# EAGLE board mainboard.job (EAGLE 6.5.0)
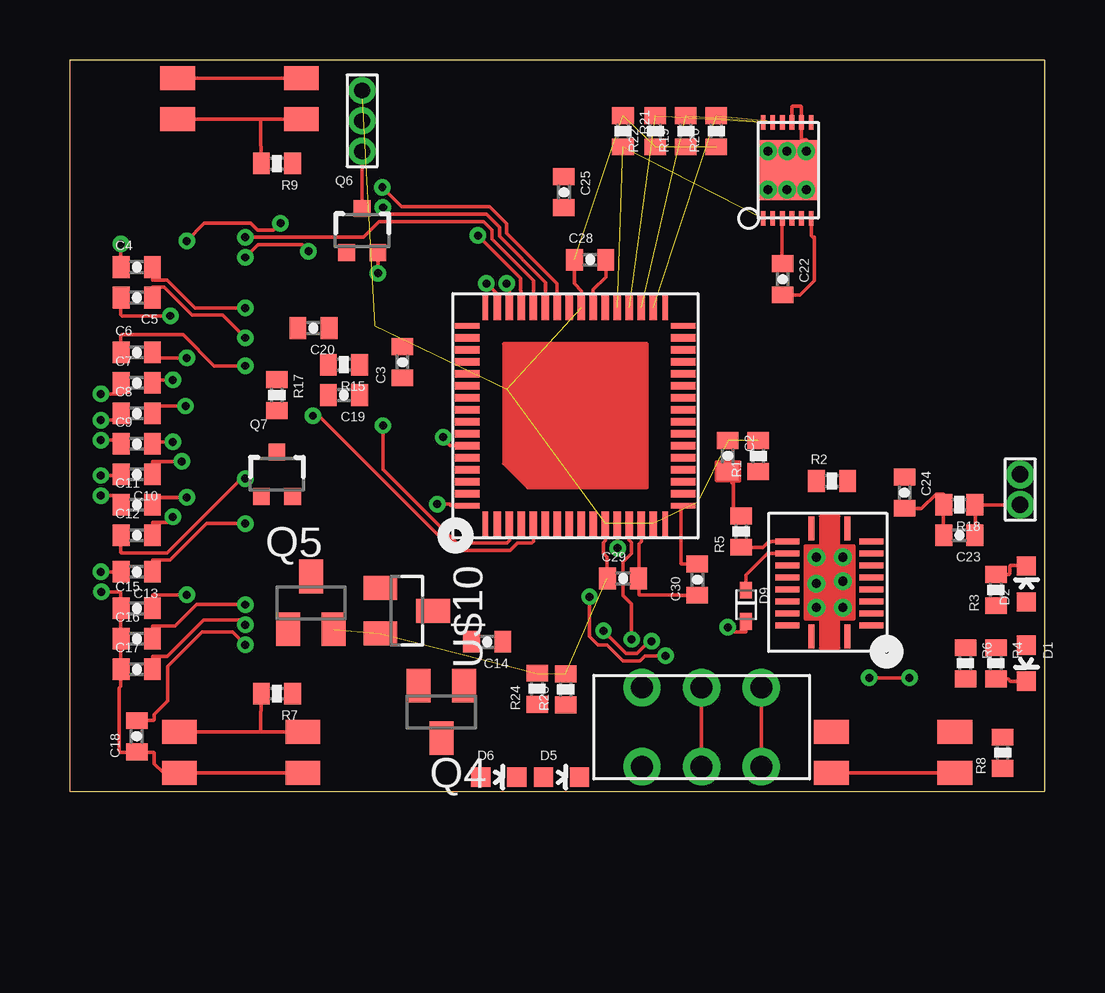
[diagram p0: board, top side]
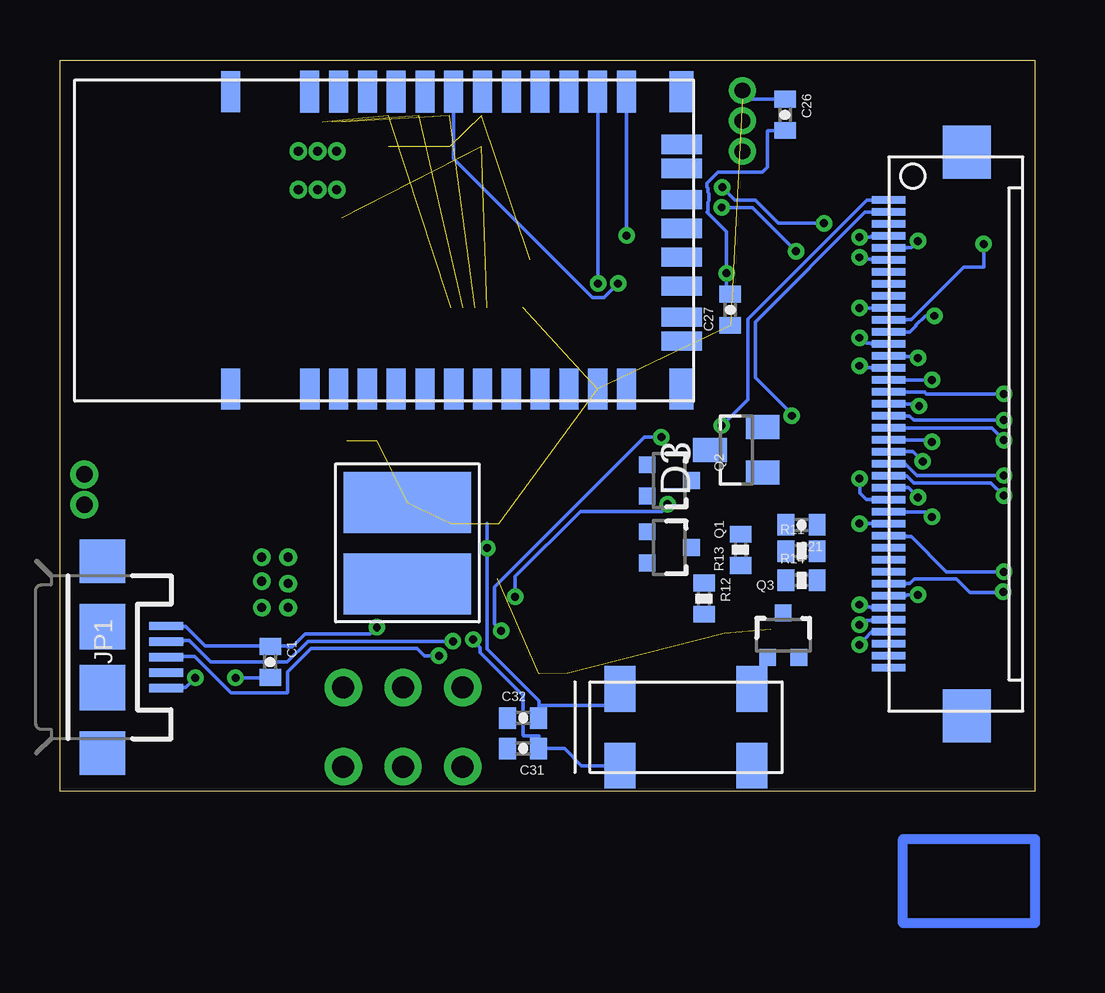
[diagram p1: board, bottom side, seen from below]

Size 40.64 x 30.48 mm. Coordinates in mm from the lower left corner, seen from the top.
Outline: 0,0 40.64,0 40.64,30.48 0,30.48 0,0
Copper layers (1*16): Top 0.035mm / dielectric 1.5mm / Bottom 0.035mm
Design rules "default *": minimum track width 6mil, minimum drill 13mil, track to track 6mil, track to pad 6mil, pad to pad 6mil, via to via 6mil, smd to smd 6mil, copper to edge 7mil, drill to drill 8mil, minimum pad ring 7mil, minimum via ring 7mil, stop-mask expansion 4mil, vias tented up to drill 0mil, thermal gap 10mil

## Footprints (pad centres in the part's own frame; a part is rotated, then mirrored left to right if it is on the bottom)
0402-CAP = smd 0.7 x 0.9: 1 -0.65,0; 2 0.65,0
LED-0603 = smd 0.8 x 0.8: A 0,-0.75; C 0,0.75
SOT23 = smd 1 x 1.4: 1 -0.95,-1.1; 2 0.95,-1.1; 3 0,1.1
SOD523 = smd 0.7 x 0.5: A 0.7,0; C -0.6,0
USB-MICROB = smd 0.35 x 1.4: D+ 0,2.65; D- -0.65,2.65; GND 1.3,2.65; ID 0.65,2.65; VBUS -1.3,2.65 | smd 1.8 x 1.9: MT1 -4,0; MT2 4,0 | smd 1.9 x 1.9: P$1 -1.27,0; P$2 1.27,0
ASPI_0428S-100M-T = smd 5.309 x 2.54: 1 0,0; 2 0,3.404
SOT323 = smd 0.7 x 0.7: 1 -0.65,-0.925; 2 0.65,-0.925; 3 0,0.925
0402-RES = smd 0.7 x 0.9: 1 -0.65,0; 2 0.65,0
VQFN_RGC_64PIN = smd 1.016 x 0.229: 1 0,8.25; 16 0,0.75; 33 9,0.75; 48 9,8.25 | smd 1.016 x 0.305: 2 0,7.75; 3 0,7.25; 4 0,6.75; 5 0,6.25; 6 0,5.75; 7 0,5.25; 8 0,4.75; 9 0,4.25; 10 0,3.75; 11 0,3.25; 12 0,2.75; 13 0,2.25; 14 0,1.75; 15 0,1.25; 34 9,1.25; 35 9,1.75; 36 9,2.25; 37 9,2.75; 38 9,3.25; 39 9,3.75; 40 9,4.25; 41 9,4.75; 42 9,5.25; 43 9,5.75; 44 9,6.25; 45 9,6.75; 46 9,7.25; 47 9,7.75 | smd 0.229 x 1.016: 17 0.75,0; 32 8.25,0; 49 8.25,9; 64 0.75,9 | smd 0.305 x 1.016: 18 1.25,0; 19 1.75,0; 20 2.25,0; 21 2.75,0; 22 3.25,0; 23 3.75,0; 24 4.25,0; 25 4.75,0; 26 5.25,0; 27 5.75,0; 28 6.25,0; 29 6.75,0; 30 7.25,0; 31 7.75,0; 50 7.75,9; 51 7.25,9; 52 6.75,9; 53 6.25,9; 54 5.75,9; 55 5.25,9; 56 4.75,9; 57 4.25,9; 58 3.75,9; 59 3.25,9; 60 2.75,9; 61 2.25,9; 62 1.75,9; 63 1.25,9
RN-42 = smd 1.7 x 0.8: 1 0.5,16; 2 0.5,14.8; 3 0.5,13.6; 4 0.5,12.4; 5 0.5,11.2; 6 0.5,10; 7 0.5,8.8; 8 0.5,7.6; 9 0.5,6.4; 10 0.5,5.2; 11 0.5,4; 12 0.5,2.8; 13 12.9,2.8; 14 12.9,4; 15 12.9,5.2; 16 12.9,6.4; 17 12.9,7.6; 18 12.9,8.8; 19 12.9,10; 20 12.9,11.2; 21 12.9,12.4; 22 12.9,13.6; 23 12.9,14.8; 24 12.9,16; P$35 0.5,19.3; P$36 12.9,19.3 | smd 0.8 x 1.7: 28 9.7,0.5; 29 3.5,0.5; 30 10.7,0.5; 31 8.4,0.5; 32 7.2,0.5; 33 6,0.5; 34 4.8,0.5; 35 2.5,0.5 | smd 1.7 x 1: P$33 0.5,0.5; P$34 12.9,0.5
VQFN_RHL_20PIN = smd 1 x 0.25: 1 0,1; 10 4.5,1; 11 4.5,2.5; 20 0,2.5 | smd 0.25 x 1: 2 0.45,0; 3 0.95,0; 4 1.45,0; 5 1.95,0; 6 2.45,0; 7 2.95,0; 8 3.45,0; 9 3.95,0; 12 3.95,3.5; 13 3.45,3.5; 14 2.95,3.5; 15 2.45,3.5; 16 1.95,3.5; 17 1.45,3.5; 18 0.95,3.5; 19 0.45,3.5 | drill 0.381: P$21 1.2,2.3; P$22 1.2,1.2; P$23 2.3,1.2; P$24 2.2,2.3; P$25 3.3,2.3; P$26 3.3,1.2
EVQ-PUK02K = smd 1.45 x 1: 1 5.15,1.7; 2 5.15,0; 3 0,1.7; 4 0,0
FH12-40S-0.5SH = smd 0.31 x 1.4: 1 0,0; 2 0.5,0; 3 1,0; 4 1.5,0; 5 2,0; 6 2.5,0; 7 3,0; 8 3.5,0; 9 4,0; 10 4.5,0; 11 5,0; 12 5.5,0; 13 6,0; 14 6.5,0; 15 7,0; 16 7.5,0; 17 8,0; 18 8.5,0; 19 9,0; 20 9.5,0; 21 10,0; 22 10.5,0; 23 11,0; 24 11.5,0; 25 12,0; 26 12.5,0; 27 13,0; 28 13.5,0; 29 14,0; 30 14.5,0; 31 15,0; 32 15.5,0; 33 16,0; 34 16.5,0; 35 17,0; 36 17.5,0; 37 18,0; 38 18.5,0; 39 19,0; 40 19.5,0 | smd 2.2 x 2: G@0 -2,3.25; G@1 21.5,3.25
SON_DRZ_12PIN = smd 0.2 x 0.6: 1 0.2,0; 2 0.6,0; 3 1,0; 4 1.4,0; 5 1.8,0; 6 2.2,0; 7 2.2,4; 8 1.8,4; 9 1.4,4; 10 1,4; 11 0.6,4; 12 0.2,4 | smd 2.5 x 2.5: 13 1.25,2 | drill 0.381: P$15 0.4,2.8; P$16 1.2,2.8; P$17 2,2.8; P$18 2,1.2; P$19 1.2,1.2; P$20 0.4,1.2
HEADER_2PIN_50MIL = drill 0.686 pad 1.016: 1 1.27,1.27; 2 1.27,2.54
HEADER_3PIN_50MIL = drill 0.66 pad 1.016: 1 1.27,1.27; 2 1.27,2.54; 3 1.27,3.81
JS2202011AQN = drill 0.914: 1 2.007,0; 2 4.496,0; 3 6.985,0; 4 2.007,3.302; 5 4.496,3.302; 6 6.985,3.302
ECS-327-12.5-17X-C-TR = smd 1.3 x 1.9: 1 1.25,0.3; 2 6.75,0.3; 3 6.75,3.5; 4 1.25,3.5

## Placement (x,y rotation side)
C1  0.1uF  [0402-CAP]  31.88,5.38 270 bottom
C2  10uF  [0402-CAP]  27.43,13.97 270 top
C3  [0402-CAP]  13.87,17.88 90 top
C4  [0402-CAP]  2.79,21.84 0 top
C5  [0402-CAP]  2.79,20.57 180 top
C6  [0402-CAP]  2.79,18.29 0 top
C7  [0402-CAP]  2.79,17.02 0 top
C8  [0402-CAP]  2.79,15.75 0 top
C9  [0402-CAP]  2.79,14.48 0 top
C10  [0402-CAP]  2.79,13.21 180 top
C11  [0402-CAP]  2.79,11.94 0 top
C12  [0402-CAP]  2.79,10.67 0 top
C13  [0402-CAP]  2.79,9.14 180 top
C14  [0402-CAP]  17.4,6.22 180 top
C15  [0402-CAP]  2.79,7.62 0 top
C16  [0402-CAP]  2.79,6.35 0 top
C17  [0402-CAP]  2.79,5.08 0 top
C18  [0402-CAP]  2.79,2.29 90 top
C19  [0402-CAP]  11.43,16.51 180 top
C20  [0402-CAP]  10.16,19.3 180 top
C21  [0402-CAP]  9.73,11.1 180 bottom
C22  0.1uF  [0402-CAP]  29.72,21.34 270 top
C23  0.1uF  [0402-CAP]  37.08,10.67 180 top
C24  0.1uF  [0402-CAP]  34.8,12.45 270 top
C25  0.47uF  [0402-CAP]  20.6,24.97 270 top
C26  [0402-CAP]  10.41,28.19 270 bottom
C27  0.1uF  [0402-CAP]  12.7,20.07 90 bottom
C28  0.1uF  [0402-CAP]  21.69,22.15 0 top
C29  0.1uF  [0402-CAP]  23.06,8.86 0 top
C30  0.47uF  [0402-CAP]  26.16,8.81 90 top
C31  12.5pF  [0402-CAP]  21.34,1.78 180 bottom
C32  12.5pF  [0402-CAP]  21.34,3.05 0 bottom
D1  BLUE  [LED-0603]  39.88,5.33 180 top
D2  BLUE  [LED-0603]  39.88,8.64 0 top
D3  BAT54S  [SOT23]  12.45,14.22 90 bottom
D5  BLUE  [LED-0603]  20.5,0.58 270 top
D6  BLUE  [LED-0603]  17.88,0.58 270 top
D9  [SOD523]  28.19,7.77 270 top
JP1  USB-MICROB  [USB-MICROB]  38.86,5.59 270 bottom
L1  10uH  [ASPI_0428S-100M-T]  26.16,8.64 0 bottom
Q1  MOSFET-NCHANNEL2N7002PW  [SOT323]  15.24,10.16 270 bottom
Q2  MOSFET-NCHANNEL2N7002PW  [SOT323]  15.24,12.95 270 bottom
Q3  MOSFET-NCHANNEL2N7002PW  [SOT323]  10.49,6.5 0 bottom
Q4  BSS84  [SOT23]  15.49,3.3 180 top
Q5  BSS84  [SOT23]  10.06,7.85 0 top
Q6  MOSFET-NCHANNEL2N7002PW  [SOT323]  12.19,23.37 0 top
Q7  MOSFET-NCHANNEL2N7002PW  [SOT323]  8.64,13.21 0 top
R1  56K  [0402-RES]  28.7,13.97 90 top
R2  10K  [0402-RES]  31.78,12.93 0 top
R3  1.5K  [0402-RES]  38.61,8.38 90 top
R4  1.5K  [0402-RES]  38.61,5.33 270 top
R5  1.6K  [0402-RES]  27.99,10.82 90 top
R6  10K  [0402-RES]  37.34,5.33 270 top
R7  10K  [0402-RES]  8.64,4.06 180 top
R8  10K  [0402-RES]  38.89,1.6 90 top
R9  10K  [0402-RES]  8.64,26.16 180 top
R11  [0402-RES]  9.73,10.01 0 bottom
R12  [0402-RES]  13.79,8.03 270 bottom
R13  [0402-RES]  12.27,10.06 90 bottom
R14  [0402-RES]  9.73,8.79 0 bottom
R15  [0402-RES]  11.43,17.78 180 top
R17  [0402-RES]  8.64,16.51 270 top
R18  0.01  [0402-RES]  37.08,11.94 180 top
R19  10K  [0402-RES]  25.68,27.51 90 top
R20  10K  [0402-RES]  26.95,27.51 90 top
R21  1.8M  [0402-RES]  23.06,27.51 270 top
R22  10K  [0402-RES]  24.41,27.51 90 top
R23  80  [0402-RES]  20.68,4.24 90 top
R24  80  [0402-RES]  19.48,4.27 90 top
U$1  MSP430F5528  [VQFN_RGC_64PIN]  25.58,11.15 90 top
U$2  RN-42  [RN-42]  14.22,16.26 90 bottom
U$3  BQ25010  [VQFN_RHL_20PIN]  33.43,6.45 90 top
U$4  RA_TAC_BUTTON"EVQPUK"  [EVQ-PUK02K]  4.57,0.76 0 top
U$5  RA_TAC_BUTTON"EVQPUK"  [EVQ-PUK02K]  31.75,0.76 0 top
U$6  RA_TAC_BUTTON"EVQPUK"  [EVQ-PUK02K]  9.65,29.72 180 top
U$8  FH12-40S-0.5SH  [FH12-40S-0.5SH]  6.1,24.64 270 bottom
U$9  BQ27410  [SON_DRZ_12PIN]  28.7,23.88 0 top
U$10  DMG2305UX  [SOT23]  14.05,7.52 270 top
U$11  HEADER_2PIN_50MIL  [HEADER_2PIN_50MIL]  40.89,14.48 180 top
U$12  HEADER_3PIN_50MIL  [HEADER_3PIN_50MIL]  10.92,25.4 0 top
U$13  SWITCH_SLIDEMICRO_SWITCH  [JS2202011AQN]  21.84,1.02 0 top
X1  CRYSTAL"32.768"  [ECS-327-12.5-17X-C-TR]  18.54,0.76 0 bottom

## Library data of the parts
C1-C32 = SparkFun-Capacitors
D1 D2 D5 D6 = SparkFun-LED; PROD_ID: DIO-08575
D3 = diode
D9 = SparkFun-DiscreteSemi
JP1 = SparkFun-Connectors; PROD_ID: CONN-09505
L1 U$1-U$3 U$8-U$12 X1 = TuansLib
Q1-Q3 Q6 Q7 = SparkFun-DiscreteSemi; PROD_ID: TRANS-11151
Q4 Q5 = transistor-small-signal
R1-R9 R11-R15 R17-R24 = SparkFun-Passives
U$4-U$6 = TuansLib; PART#: EVQ-PUK02K
U$13 = TuansLib; PART#: JS202011AQN

## Nets
BATT_PWR: C22.1 C24.1 U$3.16 U$3.17 U$9.3 U$9.4 U$11.1 U$13.2 U$13.5
BORDER: Q3.3 R14.1 U$8.38
BT_BAUD: U$1.48 U$2.4
BT_CONN: U$1.47 U$2.19
BTN_0: R7.1 U$1.26
BTN_1: R8.1 U$1.27
BTN_2: R9.1 U$1.28
BTN_3: U$1.29
EPD_BORDER: Q4.1 U$1.7
EPD_BUSY: U$1.5 U$8.2
EPD_CS: U$1.3 U$8.1
EPD_DISCHARGE: Q1.1 Q2.1 U$1.8
EPD_PANEL: Q5.1 Q7.1 U$1.4
EPD_PWM: C14.1 U$1.19
EPD_RST: U$1.6 U$8.7
GND: C1.2 C2.2 C3.1 C15.1 C16.1 C17.1 C18.1 C19.1 C20.1 C21.2 C22.2 C23.2 C24.2 C25.2 C26.2 C27.2 C28.2 C29.2 C30.1 C31.2 C32.1 D3.2 JP1.GND JP1.MT1 JP1.MT2 Q1.2 Q2.2 Q6.2 Q7.2 R2.1 R5.2 R18.2 U$1.14 U$1.16 U$1.39 U$1.49 U$1.56 U$2.1 U$2.12 U$2.28 U$2.29 U$3.3 U$3.9 U$3.15 U$3.18 U$3.20 U$4.2 U$4.4 U$5.2 U$5.4 U$6.2 U$6.4 U$8.3 U$8.33 U$9.6 U$9.8 U$9.9 U$9.13 U$9.P$15 U$9.P$16 U$9.P$17 U$9.P$18 U$9.P$19 U$9.P$20
LED_0: D5.C U$1.30
LED_1: D6.C U$1.31
LED_2: U$1.32
LED_3: U$1.33
N$1: R5.1 U$3.12
N$2: D1.C R4.2
N$3: D9.C U$3.13
N$4: D2.C R3.2
N$5: R1.1 R2.2 U$3.2
N$6: L1.1 U$3.19
N$7: C30.2 U$1.17
N$8: Q4.3 R13.2
N$9: C14.2 D3.3
N$10: R4.1 U$3.7
N$11: R3.1 U$3.8
N$12: R6.1 U$3.4
N$13: R7.2 U$4.1 U$4.3
N$14: R8.2 U$5.1 U$5.3
N$15: R9.2 U$6.1 U$6.3
N$19: Q6.3 U$12.1
N$20: R6.2 U$13.3 U$13.6
N$26: C4.2 U$8.10
N$27: C4.1 U$8.11
N$28: C5.2 U$8.12
N$29: C5.1 U$8.13
N$30: C6.2 U$8.14
N$31: C6.1 U$8.15
N$32: C7.2 U$8.16
N$33: C7.1 U$8.17
N$34: C8.2 U$8.18
N$35: C8.1 U$8.19
N$36: C9.1 U$8.20
N$37: C9.2 U$8.21
N$38: C10.1 U$8.22
N$39: C10.2 U$8.23
N$40: C11.1 U$8.24
N$41: C11.2 U$8.25
N$42: C12.1 U$8.26
N$43: C12.2 U$8.27
N$44: C13.1 U$8.28
N$45: C13.2 U$8.29
N$46: C3.2 U$8.9
N$47: R15.1 U$10.3
N$48: D5.A R23.1
N$49: Q3.1 R12.1 R13.1
N$50: C20.2 Q5.3 R17.1 U$10.1
N$51: D6.A R24.1
N$52: Q7.3 R17.2
PM_BIN: R21.2 U$1.37 U$9.1
PM_GPOUT: R22.2 U$1.36 U$9.12
PM_SCL: R19.2 U$1.35 U$9.11
PM_SDA: R20.2 U$1.34 U$9.10
PM_SRP: C23.1 R18.1 U$9.7 U$11.2
SENSOR_DATA: U$1.1 U$1.2 U$12.2
SENSOR_EN: Q6.1 U$1.20
SPI_CLK: U$1.44 U$8.4
SPI_MISO: U$1.43 U$8.6
SPI_MOSI: U$1.42 U$8.5
SPYBY_RST: JP1.D+ U$1.64
SPYBY_TEST: JP1.D- U$1.59
UART_RX: U$1.46 U$2.14
UART_TX: U$1.45 U$2.13
VCC: C2.1 C26.1 C27.1 C28.1 C29.1 L1.2 Q5.2 R1.2 R19.1 R20.1 R21.1 R22.1 R23.2 R24.2 U$1.11 U$1.15 U$1.40 U$2.11 U$10.2 U$12.3
VCC_R: C25.1 U$9.2 U$9.5
VCC_T: C19.2 Q4.2 R15.2 U$8.31 U$8.32
VCOM: C21.1 R11.2 R14.2 U$8.39 U$8.40
VCOM_DRIVER: R11.1 U$8.30
VDH: C17.2 Q1.3 U$8.36
VDL: C18.2 Q3.2 R12.2 U$8.37
VGH: C15.2 Q2.3 U$8.34
VGL: C16.2 D3.1 U$8.35
VUSB: C1.1 D1.A D2.A D9.A JP1.VBUS U$3.6
XIN: C32.2 U$1.12 X1.4
XOUT: C31.1 U$1.13 X1.1

## Tracks (layer width: path | path; a pad name or v marks a point on that pad's centre or on a via)
BATT_PWR
  Top 0.152: C22.1 29.72,21.97 29.69,22 U$9.3 | U$13.5 U$13.2
BT_CONN  (via drill 0.33 pad 0.51)
  Top 0.152: v17.37,21.16 17.58,20.95 17.6,20.95 17.83,20.73 17.83,20.17 U$1.47
  Bottom 0.152: v17.37,21.16 17.96,20.57 18.44,20.57 24.23,26.36 24.23,29.13 U$2.19
EPD_BUSY  (via drill 0.33 pad 0.51)
  Top 0.152: v10.13,15.65 10.39,15.65 16,10.03 18.36,10.03 18.67,10.34 19.25,10.34 19.33,10.41 U$1.5
  Bottom 0.152: v10.13,15.65 10.13,15.72 11.66,17.25 11.66,19.56 7.09,24.13 U$8.2
EPD_CS  (via drill 0.33 pad 0.51)
  Top 0.152: v13.06,15.24 13.06,13.41 16.13,10.34 18.24,10.34 18.34,10.44 U$1.3
  Bottom 0.152: U$8.1 7.01,24.64 11.96,19.68 11.96,16.33 v13.06,15.24
GND  (via drill 0.33 pad 0.51)
  Top 0.152: v1.32,8.31 2.11,8.31 2.13,8.28 C15.1 2.13,7.57 C16.1 2.13,6.3 C17.1 2.13,5.03 2.13,4.37 2.06,4.29 2.06,1.7 2.13,1.63 2.74,1.63 C18.1 2.79,1.63 3.5,1.63 3.53,1.6 3.53,1.14 3.91,0.76 U$4.4 U$4.2 | U$5.4 U$5.2 | U$1.39 21.82,20.17 21.82,20.9 22.35,21.44 22.35,22.15 C28.2 | C23.2 R18.2 36.42,11.99 36.42,12.39 36.12,12.39 35.51,11.79 34.8,11.79 C24.2 | v12.85,21.59 12.85,22.43 Q6.2 | U$6.2 U$6.4 | C30.1 25.45,8.15 25.43,8.18 23.75,8.18 23.72,8.2 23.72,8.87 C29.2 23.72,8.91 23.72,10.31 23.82,10.41 U$1.14 | C22.2 29.72,20.68 30.43,20.68 31.04,21.29 31.04,23.09 30.99,23.09 30.91,23.16 30.91,23.88 U$9.6 | U$9.9 30.1,28.52 30.12,28.55 30.48,28.55 30.5,28.52 U$9.8 30.5,27.15 30.7,27.15 U$9.P$17 | v35,4.72 v33.33,4.72 | 27.61,12.95 27.61,13.31 C2.2 | 27.61,12.95 27.61,12.85 | 27.61,12.95 26.95,12.95 26.95,13.72 27.91,13.72 27.91,12.93 27.66,12.93 27.66,11.48 R5.2
  Bottom 0.152: U$8.33 5.38,8.64 5.36,8.66 5.21,8.66 5.03,8.84 3.28,8.84 2.72,8.28 1.35,8.28 v1.32,8.31 | C26.2 11.12,27.53 11.15,27.51 11.15,26.01 11.35,25.81 13.21,25.81 13.66,25.35 13.66,25.17 13.64,25.15 13.64,24.97 13.59,24.92 13.59,24.61 13.64,24.56 13.64,24.16 13.66,24.13 12.85,23.32 v12.85,21.59 12.85,20.73 C27.2 | v33.33,4.72 C1.2 | v35,4.72 35.41,4.32 35.48,4.32 35.51,4.29 36.2,4.29 JP1.GND
N$1
  Top 0.152: R5.1 28.91,10.16 29.13,10.39 29.21,10.39 29.23,10.41 29.92,10.41 U$3.12
N$2
  Top 0.152: D1.C 39.22,4.57 39.12,4.67 R4.2
N$3
  Top 0.152: D9.C 28.19,9.02 29.08,9.91 U$3.13
N$4
  Top 0.152: D2.C 39.22,9.4 39.19,9.37 39.19,9.07 39.17,9.04 38.61,9.04 R3.2
N$7
  Top 0.152: C30.2 26.16,9.47 25.5,9.47 25.48,9.5 25.48,11.91 25.58,11.91 U$1.17
N$13
  Top 0.152: 7.95,2.46 U$4.3 | 7.95,2.46 9.7,2.46 U$4.1 | 7.95,2.46 7.95,3.33 7.98,3.35 7.98,4.06 R7.2
N$15
  Top 0.152: 7.95,28.02 4.52,28.02 U$6.1 | 7.95,28.02 U$6.3 | 7.95,28.02 7.95,26.9 7.98,26.87 7.98,26.16 R9.2
N$17
  Bottom 0.406: 0,-2 5.5,-2 5.5,-5.5 0,-5.5 0,-2
N$19
  Top 0.152: Q6.3 U$12.1
N$20
  Top 0.152: U$13.3 U$13.6
N$26  (via drill 0.33 pad 0.51)
  Top 0.152: C4.2 3.45,21.84 3.45,21.31 4.06,21.31 5.23,20.14 v7.32,20.14
  Bottom 0.152: v7.32,20.14 U$8.10
N$27  (via drill 0.33 pad 0.51)
  Top 0.152: v2.13,22.81 C4.1
  Bottom 0.152: U$8.11 5.38,19.63 5.36,19.66 5.16,19.66 2.97,21.84 C4.1 v2.13,22.81
N$28  (via drill 0.33 pad 0.51)
  Top 0.152: v4.19,19.81 2.18,19.81 2.13,19.86 C5.2
  Bottom 0.152: v4.19,19.81 4.57,19.81 4.95,19.43 4.95,19.38 5.21,19.13 6.1,19.13 U$8.12
N$29  (via drill 0.33 pad 0.51)
  Top 0.152: v7.32,18.9 6.38,19.84 5.11,19.84 3.94,21.01 3.45,21.01 3.45,20.57 C5.1
  Bottom 0.152: v7.32,18.9 7.26,18.9 7.04,18.67 6.83,18.67 6.81,18.64 U$8.13
N$30  (via drill 0.33 pad 0.51)
  Top 0.152: C6.2 3.45,18.29 3.45,18.06 v4.88,18.06 5,18.06
  Bottom 0.152: v4.88,18.06 5.11,18.06 5.16,18.11 5.36,18.11 5.38,18.14 U$8.14
N$31  (via drill 0.33 pad 0.51)
  Top 0.152: v7.32,17.73 6.02,17.73 4.72,19.02 2.16,19.02 2.13,19 C6.1
  Bottom 0.152: v7.32,17.73 7.11,17.73 7.04,17.65 6.83,17.65 6.81,17.63 6.1,17.63 U$8.15
N$32  (via drill 0.33 pad 0.51)
  Top 0.152: v4.29,17.14 3.45,17.14 3.45,17.02 C7.2
  Bottom 0.152: v4.29,17.14 U$8.16
N$33  (via drill 0.33 pad 0.51)
  Top 0.152: v1.29,16.56 2.13,16.56 C7.1
  Bottom 0.152: v1.29,16.56 4.52,16.56 4.6,16.64 U$8.17
N$34  (via drill 0.33 pad 0.51)
  Top 0.152: v4.83,16.05 3.45,16.05 3.45,15.75 C8.2
  Bottom 0.152: v4.83,16.05 4.9,16.13 U$8.18
N$35  (via drill 0.33 pad 0.51)
  Top 0.152: v1.29,15.47 2.13,15.47 C8.1
  Bottom 0.152: v1.29,15.47 5.05,15.47 5.23,15.65 U$8.19
N$36  (via drill 0.33 pad 0.51)
  Top 0.152: v1.29,14.63 2.13,14.63 C9.1
  Bottom 0.152: U$8.20 1.8,15.14 v1.29,14.63 | U$8.20
N$37  (via drill 0.33 pad 0.51)
  Top 0.152: v4.29,14.55 3.45,14.55 3.45,14.48 C9.2
  Bottom 0.152: v4.29,14.55 4.37,14.63 U$8.21
N$38  (via drill 0.33 pad 0.51)
  Top 0.152: v4.67,13.74 3.45,13.74 3.45,13.21 C10.1
  Bottom 0.152: v4.67,13.74 5.08,14.15 U$8.22
N$39  (via drill 0.33 pad 0.51)
  Top 0.152: v1.29,13.16 2.13,13.16 C10.2
  Bottom 0.152: v1.29,13.16 4.93,13.16 5.41,13.64 U$8.23
N$40  (via drill 0.33 pad 0.51)
  Top 0.152: v1.29,12.32 2.13,12.32 C11.1
  Bottom 0.152: v1.29,12.32 1.83,12.85 5.05,12.85 5.33,13.13 U$8.24
N$41  (via drill 0.33 pad 0.51)
  Top 0.152: v4.88,12.24 3.45,12.24 3.45,11.94 C11.2
  Bottom 0.152: v4.88,12.24 5.28,12.65 U$8.25
N$42  (via drill 0.33 pad 0.51)
  Top 0.152: v7.32,13.03 7.16,13.03 4.06,9.93 2.16,9.93 2.13,9.96 C12.1
  Bottom 0.152: U$8.26 6.81,12.14 6.83,12.17 7.04,12.17 7.29,12.42 7.29,13.01 v7.32,13.03
N$43  (via drill 0.33 pad 0.51)
  Top 0.152: v4.29,11.43 4.06,11.2 3.45,11.2 3.45,10.67 C12.2
  Bottom 0.152: v4.29,11.43 4.5,11.63 U$8.27
N$44  (via drill 0.33 pad 0.51)
  Top 0.152: v7.32,11.15 5.71,11.15 4.19,9.63 3.45,9.63 3.45,9.14 C13.1
  Bottom 0.152: v7.32,11.15 U$8.28
N$45  (via drill 0.33 pad 0.51)
  Top 0.152: v1.29,9.14 2.11,9.14 2.13,9.17 2.16,9.14 C13.2
  Bottom 0.152: v1.29,9.14 3.68,9.14 5.16,10.62 5.36,10.62 5.38,10.64 U$8.29
PM_BIN  (2 unrouted)
PM_GPOUT  (2 unrouted)
PM_SCL  (2 unrouted)
PM_SDA  (2 unrouted)
PM_SRP
  Top 0.152: C23.1 37.74,10.67 37.74,11.94 R18.1 U$11.2
SPI_CLK  (via drill 0.33 pad 0.51)
  Top 0.152: v7.32,23.09 12.24,23.09 12.9,23.75 17.25,23.75 17.6,23.39 17.6,23.01 19.33,21.29 19.33,20.17 U$1.44
  Bottom 0.152: v7.32,23.09 6.86,23.09 6.81,23.14 U$8.4
SPI_MISO  (via drill 0.33 pad 0.51)
  Top 0.152: v13.06,24.33 13.34,24.05 17.37,24.05 17.91,23.52 17.91,23.14 19.84,21.21 19.84,20.17 U$1.43 | v9.96,22.5 9.68,22.78 7.85,22.78 v7.32,22.25
  Bottom 0.152: v13.06,24.33 11.79,24.33 v9.96,22.5 | v7.32,22.25 7.11,22.25 7.04,22.17 6.83,22.17 6.81,22.15 U$8.6
SPI_MOSI  (via drill 0.33 pad 0.51)
  Top 0.152: v13.03,25.17 13.84,24.36 17.5,24.36 18.21,23.65 18.21,23.27 20.32,21.16 20.32,20.17 U$1.42 | v8.79,23.67 8.51,23.39 7.82,23.39 7.54,23.67 5.61,23.67 v4.88,22.94
  Bottom 0.152: v13.03,25.17 12.5,24.64 11.66,24.64 10.69,23.67 v8.79,23.67 | v4.88,22.94 5.16,22.66 5.36,22.66 5.38,22.63 U$8.5
SPYBY_RST  (via drill 0.33 pad 0.51)
  Top 0.152: v24.84,5.64 23.98,5.64 23.77,5.44 23.06,5.44 22.4,6.1 22.02,6.1 21.67,6.45 v21.67,8.1 | v15.32,11.96 15.82,11.96 15.88,11.91 16.56,11.91 U$1.64
  Bottom 0.152: JP1.D+ 35.51,5.59 35.48,5.61 35.03,5.61 33.5,4.09 31.17,4.09 31.14,4.12 31.14,4.98 30.18,5.94 25.76,5.94 25.45,5.64 v24.84,5.64 | v21.67,8.1 21.67,8.94 18.95,11.66 15.54,11.66 15.32,11.89 v15.32,11.96
SPYBY_TEST  (via drill 0.33 pad 0.51)
  Top 0.152: v24.26,6.25 24.16,6.25 23.65,5.74 23.19,5.74 v22.25,6.68 | v15.57,14.76 15.57,14.68 15.85,14.4 16.56,14.4 U$1.59
  Bottom 0.152: v24.26,6.25 30.3,6.25 31.17,5.38 34.37,5.38 35.26,6.27 35.48,6.27 35.51,6.25 36.2,6.25 JP1.D- | v22.25,6.68 22.53,6.96 22.53,8.51 16.28,14.76 v15.57,14.76
UART_RX  (via drill 0.33 pad 0.51)
  Top 0.152: v18.21,21.16 18.21,20.98 18.34,20.85 18.34,20.17 U$1.46
  Bottom 0.152: v18.21,21.16 18.21,29.13 U$2.14
UART_TX  (via drill 0.33 pad 0.51)
  Top 0.152: v17.02,23.16 18.8,21.39 18.8,20.88 18.82,20.85 18.82,20.17 U$1.45
  Bottom 0.152: v17.02,23.16 17.02,29.13 U$2.13
VCC  (16 unrouted)
  Top 0.152: C28.1 21.03,21.16 21.34,20.85 21.34,20.17 U$1.40 | C29.1 22.4,9.75 22.25,9.91 22.25,10.36 22.33,10.44 U$1.11
  Bottom 0.152: C26.1 12.19,28.84 U$12.3
VDH  (via drill 0.33 pad 0.51)
  Top 0.152: C17.2 3.45,5.08 3.45,5.61 4.06,5.61 5.59,7.14 7.11,7.14 v7.32,6.93
  Bottom 0.152: v7.32,6.93 7.21,6.93 7.04,7.11 6.83,7.11 6.81,7.14 U$8.36
VDL  (via drill 0.33 pad 0.51)
  Top 0.152: C18.2 3.5,2.95 3.53,2.97 3.53,3.2 4.09,3.76 4.09,5.21 5.51,6.63 6.78,6.63 v7.32,6.1
  Bottom 0.152: v7.32,6.1 7.09,6.33 7.09,6.35 6.81,6.63 6.1,6.63 U$8.37
VGH  (via drill 0.33 pad 0.51)
  Top 0.152: v4.88,8.18 3.45,8.18 3.45,7.62 C15.2
  Bottom 0.152: v4.88,8.18 5.33,8.18 5.38,8.13 6.1,8.13 U$8.34
VGL  (via drill 0.33 pad 0.51)
  Top 0.152: v7.32,7.77 5.28,7.77 4.39,6.88 3.45,6.88 3.45,6.35 C16.2
  Bottom 0.152: v7.32,7.77 7.14,7.77 7.04,7.67 6.83,7.67 6.81,7.64 U$8.35
VUSB  (via drill 0.33 pad 0.51)
  Top 0.152: D9.A 28.19,6.63 27.64,6.63 v27.43,6.83
  Bottom 0.152: JP1.VBUS 36.2,6.88 35.51,6.88 35.48,6.86 35.41,6.86 34.59,6.04 31.88,6.04 C1.1 31.83,6.04 31.17,6.04 31.14,6.02 30.96,6.02 30.43,6.55 27.71,6.55 v27.43,6.83
XIN  (via drill 0.33 pad 0.51)
  Top 0.152: v22.84,10.13 U$1.12
  Bottom 0.152: 20.68,3.58 17.32,3.58 17.3,3.61 17.3,4.24 X1.4 | 20.68,3.58 20.68,3.05 C32.2 | 20.68,3.58 20.68,3.76 22.84,5.92 v22.84,10.13 U$1.12
XOUT  (via drill 0.33 pad 0.51)
  Top 0.152: v23.42,6.33 23.42,7.8 23.06,8.15 23.06,9.55 23.42,9.91 23.42,10.36 23.32,10.46 23.32,11.15 U$1.13
  Bottom 0.152: v23.42,6.33 23.42,6.27 23.14,5.99 23.14,5.79 21.34,3.99 21.34,2.34 21.31,2.31 20.68,2.31 20.68,1.83 C31.1 19.61,1.78 18.89,1.06 X1.1